# EAGLE board esp_prod_cumulus (EAGLE 6.4)
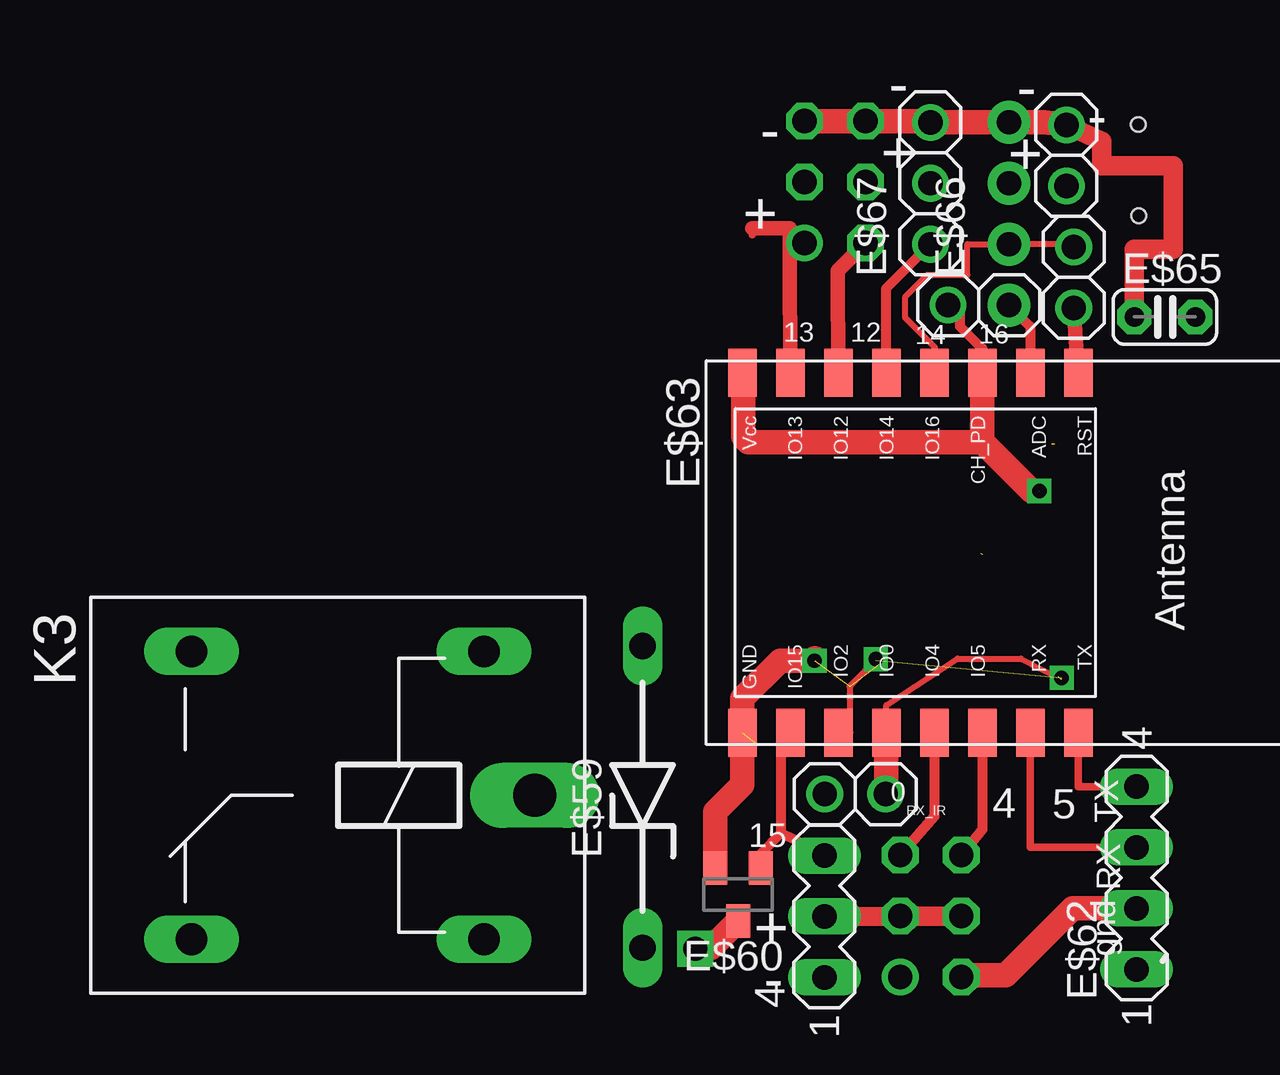
[diagram p0: board, top side]
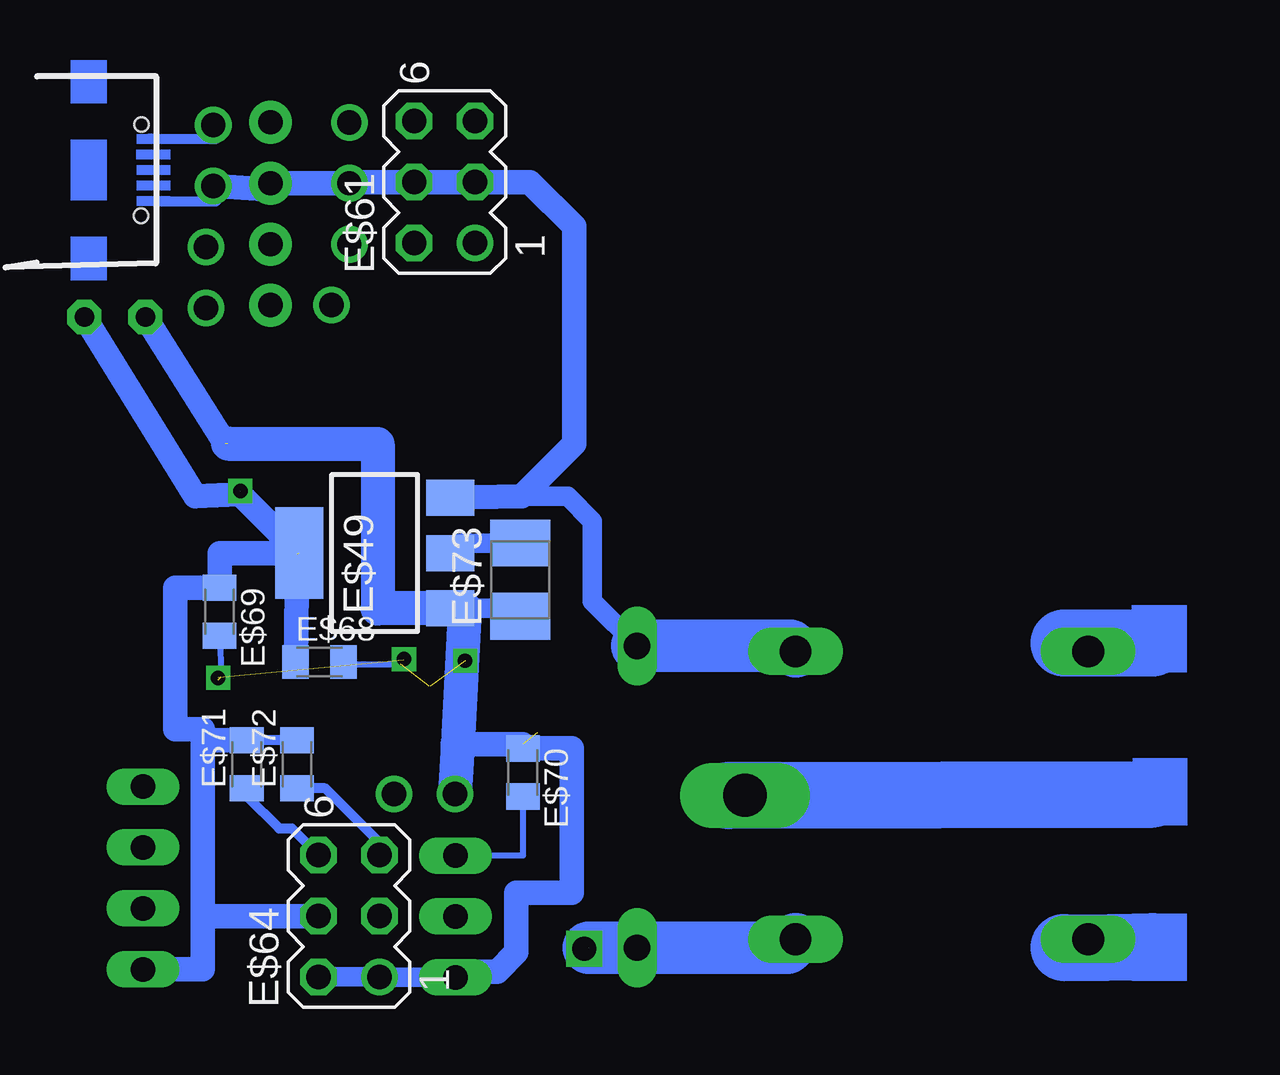
[diagram p1: board, bottom side, seen from below]

No outline drawn. Coordinates in mm, seen from the top.
Copper layers (1*16): Top 0.005mm / dielectric 1.5mm / Bottom 0.005mm
Design rules "default *": minimum track width 4mil, minimum drill 0.2mm, track to track 4mil, track to pad 4mil, pad to pad 4mil, via to via 4mil, smd to smd 8mil, copper to edge 40mil, drill to drill 8mil, minimum pad ring 10mil, minimum via ring 8mil, stop-mask expansion 4mil, vias tented up to drill 0mil, thermal gap 10mil
Net classes: 1 ground: width 0.61 mm
Holes 0.6 mm at 42.65,34.87 42.63,38.67

## Footprints (pad centres in the part's own frame; a part is rotated, then mirrored left to right if it is on the bottom)
MA03-1 = drill 1.016 long: 1 -2.54,0; 2 0,0; 3 2.54,0
SOT223 = smd 1.5 x 2: 1 -2.3,-3.15; 2 0,-3.15; 3 2.3,-3.15 | smd 3.8 x 2: 4 0,3.15
ZDIO12.5 = drill 1.1 long: A 6.223,0; C -6.35,0
SOT23 = smd 1 x 1.4: 1 -0.95,-1.1; 2 0.95,-1.1; 3 0,1.1
MA03-2 = drill 1.016: 1 -2.54,-1.27 | drill 1.016 octagon: 2 -2.54,1.27; 3 0,-1.27; 4 0,1.27; 5 2.54,-1.27; 6 2.54,1.27
MA04-1 = drill 1.016 long: 1 -3.81,0; 2 -1.27,0; 3 1.27,0; 4 3.81,0
ESP-12 = smd 2 x 1.2: 1 -7.5,4.5; 2 -7.5,2.5; 3 -7.5,0.5; 4 -7.5,-1.5; 5 -7.5,-3.5; 6 -7.5,-5.5; 7 -7.5,-7.5; 8 -7.5,-9.5; 9 7.5,-9.5; 10 7.5,-7.5; 11 7.5,-5.5; 12 7.5,-3.5; 13 7.5,-1.5; 14 7.5,0.5; 15 7.5,2.5; 16 7.5,4.5
C025-024X044 = drill 0.813 pad 1.422 octagon: 1 -1.27,0; 2 1.27,0
1X04-CLEANBIG = drill 1.016 pad 1.778: 1 -3.81,0; 2 -1.27,0; 3 1.27,0; 4 3.81,0
1X03 = drill 1.016: 1 -2.54,0; 2 0,0; 3 2.54,0
C0805K = smd 1.1 x 1.4: 1 -1,0; 2 1,0
B/3528-21R = smd 1.95 x 2.5: + 1.525,0; - -1.525,0
ZF112 = drill 1.321 long: 1 -6.096,5.994; 2 -6.096,-5.994; O 6.096,5.994; S 6.096,-5.994 | drill 1.803 long: P -8.204,0
1X02 = drill 1.016: 1 -2.54,0; 2 0,0

## Placement (x,y rotation side)
4  [MA03-1]  29.55,5.67 90 top
E$49  [SOT223]  32.91,20.81 90 bottom
E$59  [ZDIO12.5]  21.98,10.72 90 top
E$60  [SOT23]  25.95,6.58 180 top
E$61  [MA03-2]  29.99,36.27 90 bottom
E$62  [MA04-1]  42.56,7.27 90 top
E$63  [ESP-12]  35.64,20.82 270 top
E$64  [MA03-2]  33.98,5.69 90 bottom
E$65  [C025-024X044]  43.74,30.65 0 top
E$66  [1X04-CLEANBIG]  37.25,34.95 90 top
E$67  [1X03]  33.97,36.22 90 top
E$68  [C0805K]  35.21,16.27 0 bottom
E$69  [C0805K]  39.37,18.37 270 bottom
E$70  [C0805K]  26.73,11.67 270 bottom
E$71  [C0805K]  38.24,12.01 90 bottom
E$72  [C0805K]  36.15,12.01 90 bottom
E$73  [B/3528-21R]  26.84,19.7 90 bottom
K3  ZF112  [ZF112]  9.28,10.72 180 top
X1  332-02  [1X02]  39.64,38.65 90 top
X7  332-02  [1X02]  39.94,33.57 90 top
X8  332-02  [1X02]  29.57,10.77 180 top
X9  332-02  [1X02]  34.71,31.14 180 top

## Library data of the parts
4 = con-lstb; OC_FARNELL: unknown; OC_NEWARK: unknown
E$49 = v-reg
E$59 = diode
E$60 = semicon-smd-ipc
E$61 E$62 E$64 = con-lstb
E$63 E$65-E$73 = adafruit
K3 = relay; OC_FARNELL: unknown; OC_NEWARK: unknown
X1 X7-X9 = aaaa

## Nets
S$83: 4.1 E$49.1 E$60.2 E$61.5 E$61.6 E$62.2 E$63.9 E$64.1 E$64.2 E$65.1 E$66.4 E$67.3 E$70.1 E$73.- X1.2 X8.2
S$91: E$59.C E$60.3 K3.1
S$104: 4.3 E$60.1 E$63.10 E$70.2
S$105: E$62.3 E$63.15
S$106: E$62.4 E$63.16
S$108: E$63.4 E$66.2 X7.2
S$109: E$49.3 E$59.A E$61.3 E$61.4 E$66.3 E$67.2 K3.2 X1.1
S$110: E$61.1 E$63.7
S$111: E$61.2 E$63.6
S$112: E$63.1 X7.1
S$113: E$63.12 E$69.2 X8.1
S$114: E$63.13 E$64.5 E$72.1
S$115: E$63.14 E$64.6 E$71.1
S$126: E$63.5 E$67.1
S$127: E$63.2 E$66.1
S$130: E$63.11 E$68.2
S$131: 4.2 E$49.4 E$62.1 E$63.3 E$63.8 E$64.3 E$64.4 E$65.2 E$68.1 E$69.1 E$71.2 E$72.2 X9.2
S$132: E$49.2 E$73.+

## Tracks (layer width: path | path; a pad name or v marks a point on that pad's centre or on a via)
S$83  (2 unrouted)
  Top 0.813: X1.2 41.11,37.96 41.11,36.94 44.09,36.94 44.09,33.48 42.47,33.48 E$65.1
  Top 1.016: E$61.6 31.26,38.77 | E$61.6 33.91,38.81 E$67.3 E$66.4 38.69,38.76 X1.2 | E$61.5 E$61.6 | E$60.2 25,10.02 26.14,11.16 E$63.9 26.14,14.76 27.7,16.32 29.04,16.32 29.15,16.43 | E$62.2 39.9,6 37.11,3.22 35.32,3.22 E$64.2
  Bottom 0.406: 42.35,38.06 42.13,38.08 39.49,38.08 X1.2
  Bottom 0.813: 4.1 32.68,3.13 E$64.1 E$64.2 | E$49.1 27.18,18.51 E$73.-
  Bottom 1.016: 4.1 29.52,3.37 27.81,3.37 27.01,4.17 27.01,6.66 24.69,6.66 24.69,12.67 E$70.1 26.73,12.84 29.45,12.84 | E$65.1 39.14,25.37
  Bottom 1.422: 39.03,25.37 32.79,25.36 32.79,18.51 E$49.1 29.15,18.51 29.45,12.84 X8.2
S$91  (1 unrouted)
  Top 1.016: E$60.3 24.84,4.37 23.99,4.37
  Bottom 2.184: K3.1 15.73,4.37 E$59.C 23.99,4.37
S$92
  Bottom 2.794: 18.17,10.72 0.49,10.76
S$94
  Bottom 2.794: 4.2,4.37 0.49,4.41
S$95
  Bottom 2.794: 4.2,17.07 0.49,17.07
S$102  (via drill 1)
  other vias: 24.17,4.31
S$104
  Top 0.406: E$63.10 27.74,12.93 27.74,9.13 | 27.74,9.13 26.9,8.29 E$60.1 | 4.3 28.81,8.62 27.74,9.13
  Bottom 0.254: E$70.2 26.73,8.21 4.3
S$105
  Top 0.305: E$63.15 38.14,8.54 E$62.3
  Top 0.406: E$63.15
S$106
  Top 0.305: E$62.4 40.14,11.08 E$63.16
S$108
  Top 0.254: X7.2 40.1,33.68 E$66.2 35.51,33.68 35.51,32.4 33.83,32.4 32.9,31.47 32.9,30.64 34.16,29.38 34.16,28.35 E$63.4
S$109
  Bottom 0.406: 42.13,35.48 39.49,35.48 X1.1
  Bottom 0.813: 26.79,23.18 24.88,23.18 23.84,22.14 23.84,18.8 E$59.A
  Bottom 1.016: E$49.3 26.79,23.18 24.59,25.37 24.59,34.42 26.44,36.27 E$61.3 E$61.4 | 31.26,36.23 E$61.4 | E$61.4 33.91,36.27 E$67.2 E$66.3 37.51,35.96 X1.1
  Bottom 2.184: K3.2 15.6,16.94 E$59.A
S$110
  Top 0.305: 26.55,34.35 26.55,34.08
  Top 0.61: E$63.7 28.11,33.12 | 28.11,33.12 E$61.1 | 28.11,33.12 28.11,34.35 26.55,34.35
S$111
  Top 0.61: E$61.2 30.11,32.58 E$63.6
S$112
  Top 0.61: X7.1 40.1,28.36 E$63.1
S$113  (1 unrouted)
  Top 0.254: E$63.12 32.14,14.48 35.09,16.41 37.74,16.41 39.44,15.53
  Top 1.016: X8.1 32.14,11.92 E$63.12
  Bottom 0.254: E$69.2 39.3,15.66
S$114
  Top 0.406: 34.14,12.51 E$63.13 34.14,9.84 E$64.5
  Bottom 0.406: E$64.5 32.71,8.76 34.96,11.01 E$72.1
S$115
  Top 0.305: 36.15,13.34 E$63.14
  Top 0.406: E$63.14 36.14,9.3 E$64.6
  Bottom 0.406: E$71.1 38.24,10.69 36.9,9.34 36.36,9.34 E$64.6
S$117  (via drill 0.6)
  other vias: 38.51,23.4
S$125  (via drill 0.6)  (2 unrouted)
  Top 0.254: v31.69,16.39 31.69,16.34 30.6,15.26
  other vias: 29.14,16.33 39.44,15.61
S$126
  Top 0.406: E$63.5 32.14,31.85 E$67.1
S$127
  Top 0.406: E$66.1 38.14,30.25 E$63.2
S$128
  Bottom 0.406: 42.13,38.07 41.33,38.07
S$130  (1 unrouted)
  Top 0.254: E$63.11 30.64,13.32 30.64,15.26
  Bottom 0.254: E$68.2 34.2,16.27 34.1,16.17 31.83,16.17 31.69,16.31 | 31.69,16.31 | 31.69,16.31 31.72,16.34
S$131  (2 unrouted)
  Top 0.406: E$63.3 36.14,29.32 35.21,30.25 35.21,31.11 X9.2
  Top 0.813: E$64.4 E$64.3 29.96,5.65 4.2
  Top 1.016: E$63.8 26.17,28.3 26.17,25.65 26.39,25.43 36.15,25.43 | 36.15,25.43 36.14,25.44 E$63.3 | 36.15,25.43 38.2,23.39 38.51,23.39
  Bottom 0.406: E$72.2 E$71.2
  Bottom 0.813: E$49.4 36.74,20.81
  Bottom 1.016: E$49.4 38.51,23.26 | 38.51,23.26 38.51,23.39 | 38.51,23.26 40.38,23.18 E$65.2 | 36.74,20.81 39.37,20.81 E$69.1 41.23,19.37 41.23,13.46 40.08,13.46 40.08,13.01 | 36.14,20.76 E$68.1 | E$64.4 40.08,5.69 | 40.08,5.69 40.08,6.12 40.08,13.01 | E$71.2 40.08,13.01 | E$62.1 40.08,3.46 40.08,5.69
S$132
  Bottom 0.813: E$73.+ 29.34,21.23 E$49.2
(copper drawn outside any net)
  shapes: Bottom area x13

## Text on the board
tPlace: - | - | - | - | + | + | + | 13 | 12 | 14 | 16 | 0 | RX_IR | 4 | 5 | TX | 15 | RX | + | gnd | -